# EAGLE board brd file (EAGLE 9.7.0)

Size 225.41 x 98.11 mm. Coordinates in mm from the lower left corner, seen from the top.
Outline: 0,0 225.41,0 225.41,98.11 0,98.11 0,0
Copper layers (1*16): Top 0.035mm / dielectric 1.5mm / Bottom 0.035mm
Design rules "default": minimum track width 6mil, minimum drill 0.35mm, track to track 6mil, track to pad 6mil, pad to pad 6mil, via to via 6mil, smd to smd 6mil, copper to edge 40mil, drill to drill 6mil, minimum pad ring 10mil, minimum via ring 8mil, stop-mask expansion 4mil, vias tented up to drill 0mil, thermal gap 10mil

## Footprints (pad centres in the part's own frame; a part is rotated, then mirrored left to right if it is on the bottom)
HC-SR04 = drill 1.016 long: 1 -3.81,0; 2 -1.27,0; 3 1.27,0; 4 3.81,0
LU-5-R = drill 0.8: 1 -6.35,-3.81; 5 3.81,-3.81; 6 6.35,-3.81; 7 6.35,3.81; 8 3.81,3.81; 12 -6.35,3.81
MOTOR = drill 1.118 pad 3.15 octagon: + 2.54,0; - -2.54,0
BATTERY-GENERIC = drill 1.118 pad 3.15 octagon: + 2.54,0; - -2.54,0
28027 = drill 1.016 long: 1 -2.54,0; 2 0,0; 3 2.54,0
ARDUINO-UNO-R3-SHIELD = drill 1.016 pad 1.88: 3.3V 24.13,-2.54; 5V 24.13,0; A0 24.13,12.7; A1 24.13,15.24; A2 24.13,17.78; A3 24.13,20.32; A4 24.13,22.86; A5 24.13,25.4; AREF -24.13,-13.97; D2 -24.13,20.32; D3 -24.13,17.78; D4 -24.13,15.24; D5 -24.13,12.7; D6 -24.13,10.16; D7 -24.13,7.62; D8 -24.13,3.81; D9 -24.13,1.27; D10 -24.13,-1.27; D11 -24.13,-3.81; D12 -24.13,-6.35; D13 -24.13,-8.89; GND@0 24.13,2.54; GND@1 24.13,5.08; GND@2 -24.13,-11.43; IOREF 24.13,-7.62; NC 24.13,-10.16; RES 24.13,-5.08; RX -24.13,25.4; SCL -24.13,-19.05; SDA -24.13,-16.51; TX -24.13,22.86; VIN 24.13,7.62

## Placement (x,y rotation side)
DIST1  DISTANCE-SENSOR-4PINHC-SR04  [HC-SR04]  142.02,40.51 0 top
K1  RELAY-SPDT_LU-5-R  [LU-5-R]  77.63,81.17 180 top
K2  RELAY-SPDT_LU-5-R  [LU-5-R]  140.58,79.68 180 top
K3  RELAY-SPDT_LU-5-R  [LU-5-R]  189.52,78.06 180 top
M1  MOTOR_HDR  [MOTOR]  103.76,88.8 0 top
M2  MOTOR_HDR  [MOTOR]  157.86,88.99 0 top
M3  MOTOR_HDR  [MOTOR]  209.76,89.85 0 top
P1  BATTERYGENERIC  [BATTERY-GENERIC]  42.53,82.2 180 top
PIR1  PIR-SENSOR_28027  [28027]  204.45,41 0 top
U1  ARDUINO-UNO-R3-SHIELD  [ARDUINO-UNO-R3-SHIELD]  47.88,29.84 270 top

## Library data of the parts
DIST1 K1-K3 M1-M3 P1 PIR1 U1 = Tinkercad

## Nets
M1_-: K1.1 M1.-
M2_-: K2.1 M2.-
M3_-: K3.1 M3.-
P1+: M1.+ M2.+ M3.+ P1.+
P1-: K1.6 K2.6 K3.6 P1.-
U1_5V: DIST1.1 PIR1.2 U1.5V
U1_D2: K1.8 U1.D2
U1_D3: K2.8 U1.D3
U1_D4: K3.8 U1.D4
U1_D7: PIR1.1 U1.D7
U1_D8: DIST1.2 U1.D8
U1_D9: DIST1.3 U1.D9
U1_GND: DIST1.4 K1.5 K2.5 K3.5 PIR1.3 U1.GND@0 U1.GND@1 U1.GND@2

## Tracks (layer width: path | path; a pad name or v marks a point on that pad's centre or on a via)
M1_-  (1 unrouted)
M2_-  (1 unrouted)
M3_-  (1 unrouted)
P1+  (3 unrouted)
P1-  (3 unrouted)
U1_5V  (2 unrouted)
U1_D2  (1 unrouted)
U1_D3  (1 unrouted)
U1_D4  (1 unrouted)
U1_D7  (1 unrouted)
U1_D8  (1 unrouted)
U1_D9  (1 unrouted)
U1_GND  (7 unrouted)